# Altium PCB PCB1.PcbDoc
Units mil, origin at the board's own origin, x right, y up, seen from the top; angles counter-clockwise.
Board outline 6000 x 4000 mil, 2 copper layers (Top Layer, Bottom Layer); 15 components, 1 nets, 164 pads, 0 vias.
Unrouted connection lines stored in the file: 15.
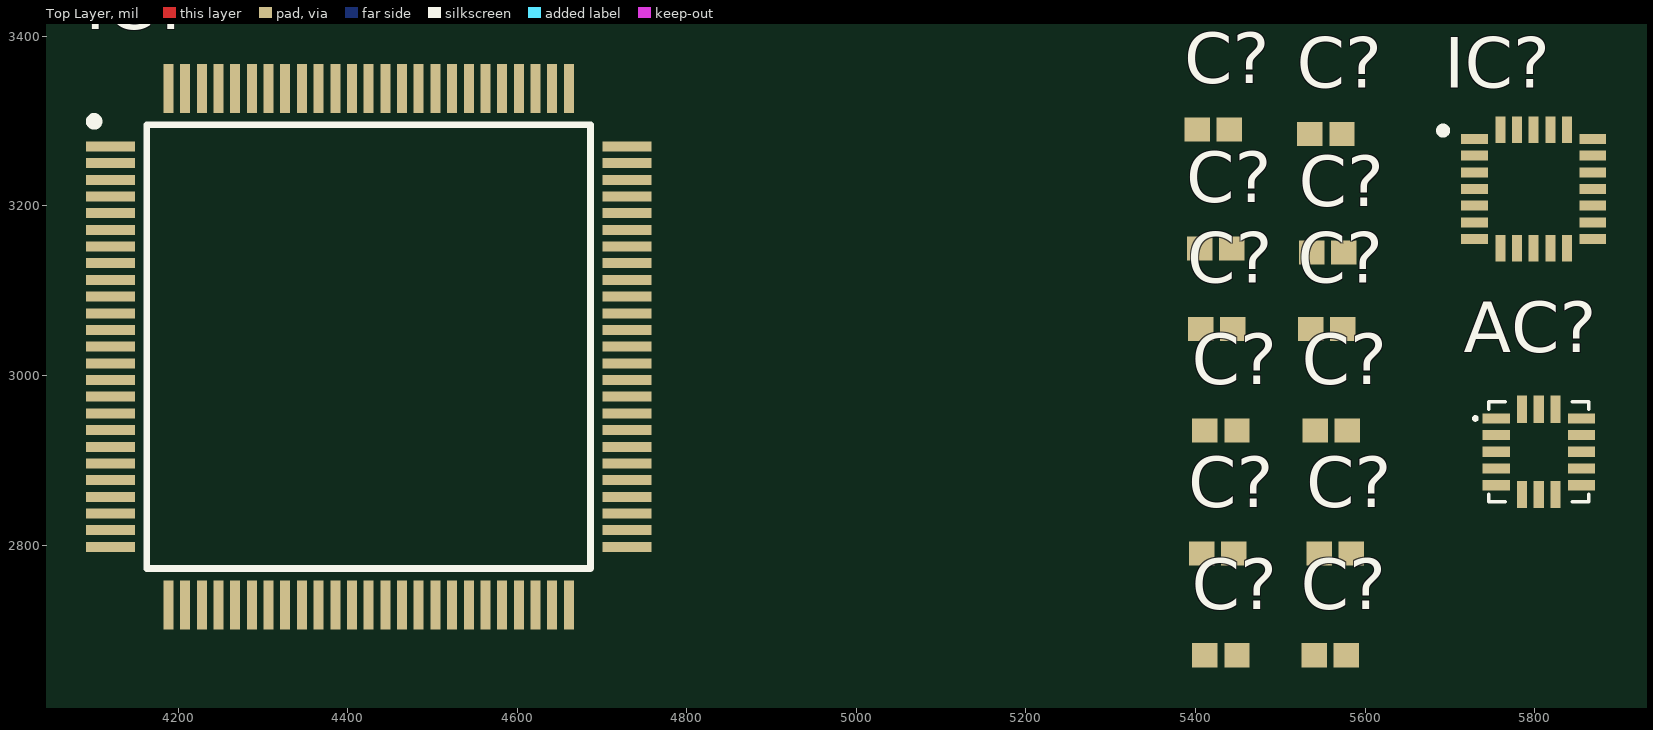
[diagram p0: Top Layer view]
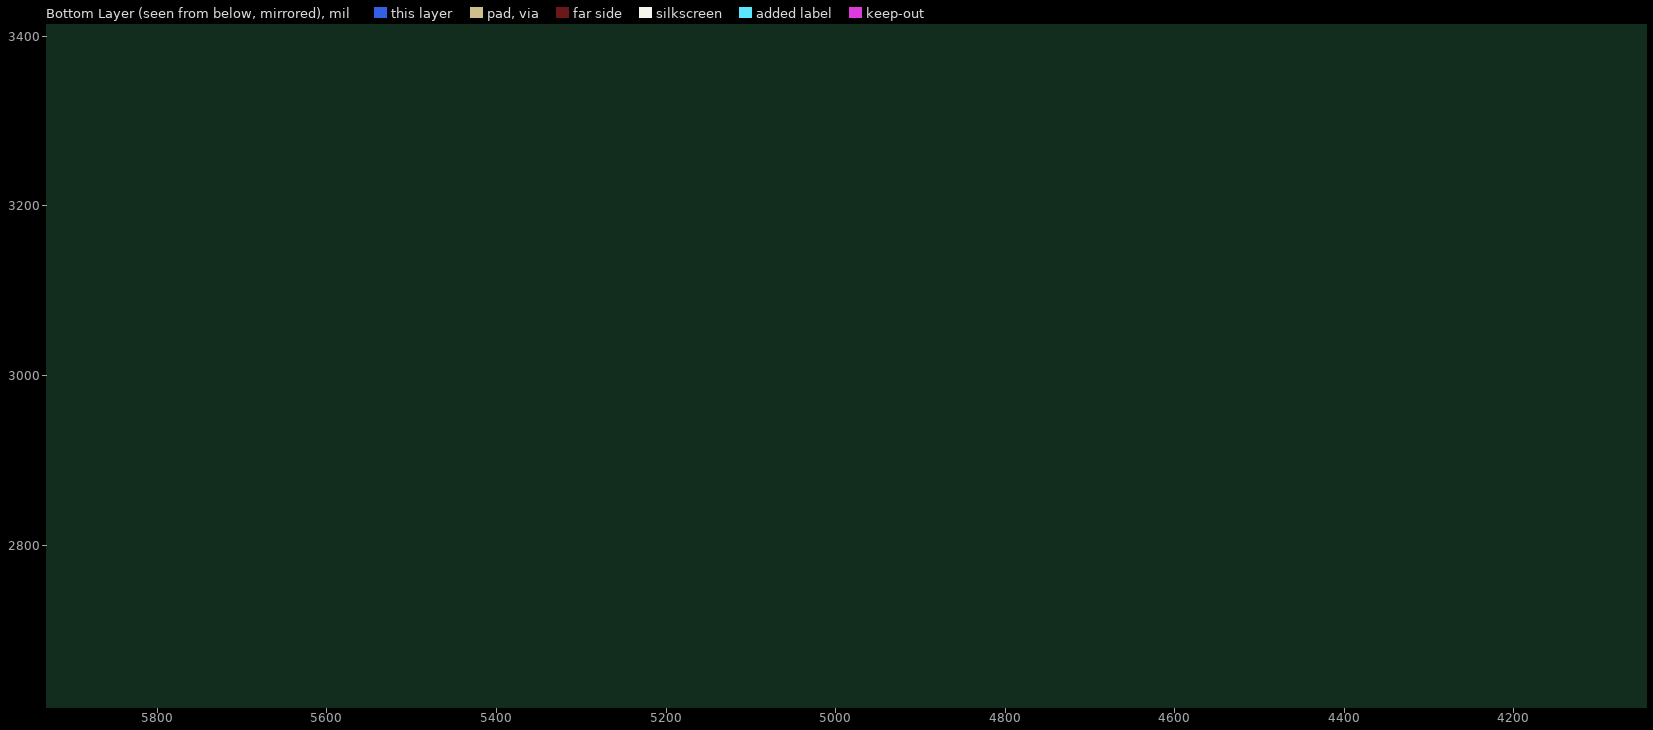
[diagram p1: Bottom Layer view, seen from below]

## Layer stack, top to bottom
Top Solder: solder mask 0.4, Solder Resist, Dk 3.5
Top Layer: signal copper 1.4
Dielectric 1: dielectric 12.6, FR-4, Dk 4.8
Bottom Layer: signal copper 1.4
Bottom Solder: solder mask 0.4, Solder Resist, Dk 3.5

## Board outline
1000,1000 7000,1000 7000,5000 1000,5000

## Design rules (kind name [scope] priority, off if disabled: settings)
Clearance [All] p1: gap=10 ignorepadtopadclearanceinfootprint=FALSE except(0: Arc-Hole Track-Hole SMDPad-Hole THPad-Hole Via-Hole Fill-Hole Poly-Hole Region-Hole Text-Hole)
PolygonConnect [All] p1: connectstyle=Relief reliefconductorwidth=10 reliefentries=4 polygonreliefangle="90 Angle" airgapwidth=10
RoomDefinition Sheet1 [InComponentClass('Sheet1')] p1: confinementstyle=ConfineIn formatcopy=TRUE lockcomponents=FALSE outline 2658.9,2615 5893.9,2615 5893.9,3415 2658.9,3415
RoutingVias [All] p1: holewidth=28 width=50 viastyle="Through Hole" minholewidth=28 minwidth=50 maxholewidth=28 maxwidth=50
SolderMaskExpansion [All] p1: expansion=4 istentingtop=FALSE
Width [All] p1: maxlimit=10 minlimit=10 preferedwidth=10
30 further rules are at their usual default settings.

## Classes and differential pairs
component class Sheet1: AC? C? IC?

## Components (designator, comment, footprint, x,y, rotation, side; value= is the part's Value field where it differs from the comment)
AC? "FXOS8700CQR1" MMA8452QT 5805,2910 r0 top
C? "C0402C104J4RACTU" CAPC1005X55X30ML05T10 5430,2670 r0 top
C? "C0402C104J4RACTU" CAPC1005X55X30ML05T10 5560,2935 r0 top
C? "C0402C104J4RACTU" CAPC1005X55X30ML05T10 5553.9,3285 r0 top
C? "C0402C104J4RACTU" CAPC1005X55X30ML05T10 5556.1,3145 r0 top
C? "C0402C104J4RACTU" CAPC1005X55X30ML05T10 5430,2935 r0 top
C? "C0402C104J4RACTU" CAPC1005X55X30ML05T10 5421.1,3290 r0 top
C? "C0402C104J4RACTU" CAPC1005X55X30ML05T10 5565,2790 r0 top
C? "C0402C104J4RACTU" CAPC1005X55X30ML05T10 5555,3055 r0 top
C? "C0402C104J4RACTU" CAPC1005X55X30ML05T10 5558.9,2670 r0 top
C? "C0402C104J4RACTU" CAPC1005X55X30ML05T10 5426.1,2790 r0 top
C? "C0402C104J4RACTU" CAPC1005X55X30ML05T10 5425,3055 r0 top
C? "C0402C104J4RACTU" CAPC1005X55X30ML05T10 5423.9,3150 r0 top
IC? "STM32L4S5VIT6" QFP50P1600X1600X160-100N 4424.65,3034.06 r0 top
IC? "FXAS21002CQR1" FXAS21002CQR1 5798.9,3220 r0 top

## Footprints (in the part's own frame and the unit in brackets; to place one, negate y for a bottom-side part, rotate by r counter-clockwise, add the part's x,y. Pads: shape width x height; smd on the part's side, far side on the other; paste and mask are expansions set on the pad)
CAPC1005X55X30ML05T10 [mm] "Chip Capacitor, 2-Leads, Body 1.00x0.50mm, IPC Low Density"
  rect 0.76x0.72 smd: 1(-0.48,0) 2(0.48,0)
  body extent -0.53,-0.28 0.53,0.27, height 0.55
FXAS21002CQR1 [mm]
  rect 0.8x0.3 smd: 1(-1.775,1.5) 2(-1.775,1) 3(-1.775,0.5) 4(-1.775,0) 5(-1.775,-0.5) 6(-1.775,-1) 7(-1.775,-1.5) 13(1.775,-1.5) 14(1.775,-1) 15(1.775,-0.5) 16(1.775,0) 17(1.775,0.5) 18(1.775,1) 19(1.775,1.5)
  rect 0.3x0.8 smd: 8(-1,-1.775) 9(-0.5,-1.775) 10(0,-1.775) 11(0.5,-1.775) 12(1,-1.775) 20(1,1.775) 21(0.5,1.775) 22(0,1.775) 23(-0.5,1.775) 24(-1,1.775)
  silkscreen extent -2.82,1.64 -2.6,1.86
MMA8452QT [mm]
  rect 0.813x0.305 smd: 1(-1.275,1) 2(-1.275,0.5) 3(-1.275,0) 4(-1.275,-0.5) 5(-1.275,-1) 9(1.275,-1) 10(1.275,-0.5) 11(1.275,0) 12(1.275,0.5) 13(1.275,1)
  rect 0.305x0.813 smd: 6(-0.5,-1.275) 7(0,-1.275) 8(0.5,-1.275) 14(0.5,1.275) 15(0,1.275) 16(-0.5,1.275)
  silkscreen extent -1.95,-1.5 1.5,1.5, body extent -1.65,-1.65 1.65,1.65, height 1.1
QFP50P1600X1600X160-100N [mm]
  rect 1.475x0.3 smd: 1(-7.738,6) 2(-7.738,5.5) 3(-7.738,5) 4(-7.738,4.5) 5(-7.738,4) 6(-7.738,3.5) 7(-7.738,3) 8(-7.738,2.5) 9(-7.738,2) 10(-7.738,1.5) 11(-7.738,1) 12(-7.738,0.5) 13(-7.738,0) 14(-7.738,-0.5) 15(-7.738,-1) 16(-7.738,-1.5) 17(-7.738,-2) 18(-7.738,-2.5) 19(-7.738,-3) 20(-7.738,-3.5) 21(-7.738,-4) 22(-7.738,-4.5) 23(-7.738,-5) 24(-7.738,-5.5) 25(-7.738,-6) 51(7.738,-6) 52(7.738,-5.5) 53(7.738,-5) 54(7.738,-4.5) 55(7.738,-4) 56(7.738,-3.5) 57(7.738,-3) 58(7.738,-2.5) 59(7.738,-2) 60(7.738,-1.5) 61(7.738,-1) 62(7.738,-0.5) 63(7.738,0) 64(7.738,0.5) 65(7.738,1) 66(7.738,1.5) 67(7.738,2) 68(7.738,2.5) 69(7.738,3) 70(7.738,3.5) 71(7.738,4) 72(7.738,4.5) 73(7.738,5) 74(7.738,5.5) 75(7.738,6)
  rect 0.3x1.475 smd: 26(-6,-7.738) 27(-5.5,-7.738) 28(-5,-7.738) 29(-4.5,-7.738) 30(-4,-7.738) 31(-3.5,-7.738) 32(-3,-7.738) 33(-2.5,-7.738) 34(-2,-7.738) 35(-1.5,-7.738) 36(-1,-7.738) 37(-0.5,-7.738) 38(0,-7.738) 39(0.5,-7.738) 40(1,-7.738) 41(1.5,-7.738) 42(2,-7.738) 43(2.5,-7.738) 44(3,-7.738) 45(3.5,-7.738) 46(4,-7.738) 47(4.5,-7.738) 48(5,-7.738) 49(5.5,-7.738) 50(6,-7.738) 76(6,7.738) 77(5.5,7.738) 78(5,7.738) 79(4.5,7.738) 80(4,7.738) 81(3.5,7.738) 82(3,7.738) 83(2.5,7.738) 84(2,7.738) 85(1.5,7.738) 86(1,7.738) 87(0.5,7.738) 88(0,7.738) 89(-0.5,7.738) 90(-1,7.738) 91(-1.5,7.738) 92(-2,7.738) 93(-2.5,7.738) 94(-3,7.738) 95(-3.5,7.738) 96(-4,7.738) 97(-4.5,7.738) 98(-5,7.738) 99(-5.5,7.738) 100(-6,7.738)
  silkscreen extent -8.35,-6.65 6.65,6.87, body extent -8,-8 8,8, height 1.6

## Part data
AC?: "Accelerometer", Manufacturer_Name=Nexperia, Mouser Part Number=841-FXOS8700CQR1, Datasheet Link=http://cache.nxp.com/files/shared/doc/package_info/98ASA00318D.pdf, Height=1mm, Manufacturer_Part_Number=FXOS8700CQR1, Mouser Price/Stock=https://www.mouser.com/Search/Refine.aspx?Keyword=841-FXOS8700CQR1
C? C? C? C? C? C? C? C? C? C? C? C?: library part CMP-2008-03080-1, Manufacturer=Kemet, Part Number=C0402C104J4RACTU
IC?: "Integrated Circuit", Manufacturer_Name=STMicroelectronics, Mouser Part Number=511-STM32L4S5VIT6, RS Part Number=1750803P, Datasheet Link=https://www.mouser.com/datasheet/2/389/stm32l4s5ai-1309291.pdf, Height=1.6mm, Manufacturer_Part_Number=STM32L4S5VIT6, Mouser Price/Stock=https://www.mouser.com/Search/Refine.aspx?Keyword=511-STM32L4S5VIT6, RS Price/Stock=http://uk.rs-online.com/web/p/products/1750803P
IC?: "Integrated Circuit", Manufacturer_Name=Nexperia, Mouser Part Number=841-FXAS21002CQR1, Datasheet Link=http://www.mouser.com/ds/2/302/FXAS21002-783424.pdf, Manufacturer_Part_Number=FXAS21002CQR1, Mouser Price/Stock=https://www.mouser.com/Search/Refine.aspx?Keyword=841-FXAS21002CQR1

## Nets (pads, with @x,y where several pads share a name; then routed paths per layer and width w, separated by ;. In a path a pad name is that pad's centre, name@x,y a point inside that pad or via, vN(x,y) a via of type N, cw(c..) or ccw(c..) an arc to the next point about the centre after c; other vN are vias at no path point)
GND: AC?.12 AC?.13 IC?.1@5729.02,3279.06 IC?.5@5729.02,3200.32 IC?.6@5729.02,3180.63 IC?.7@5729.02,3160.94 IC?.8@5759.53,3150.12 IC?.9@5779.21,3150.12 IC?.10@5798.9,3150.12 IC?.14@5868.78,3180.63 IC?.19@5868.78,3279.06 IC?.20@5838.27,3289.88 IC?.21@5818.58,3289.88 IC?.22@5798.9,3289.88 IC?.23@5779.21,3289.88 IC?.24@5759.53,3289.88
pads on no net: AC?.1 AC?.2 AC?.3 AC?.4 AC?.5 AC?.6 AC?.7 AC?.8 AC?.9 AC?.10 AC?.11 AC?.14 AC?.15 AC?.16 C?.1 C?.2 IC?.1@4120,3270.28 IC?.2 IC?.3 IC?.4 IC?.5@4120,3191.54 IC?.6@4120,3171.85 IC?.7@4120,3152.17 IC?.8@4120,3132.48 IC?.9@4120,3112.8 IC?.10@4120,3093.11 IC?.11 IC?.12 IC?.13 IC?.14@4120,3014.37 IC?.15 IC?.16 IC?.17 IC?.18 IC?.19@4120,2915.94 IC?.20@4120,2896.26 IC?.21@4120,2876.57 IC?.22@4120,2856.89 IC?.23@4120,2837.2 IC?.24@4120,2817.52 IC?.25 IC?.26 IC?.27 IC?.28 IC?.29 IC?.30 IC?.31 IC?.32 IC?.33 IC?.34 IC?.35 IC?.36 IC?.37 IC?.38 IC?.39 IC?.40 IC?.41 IC?.42 IC?.43 IC?.44 IC?.45 IC?.46 IC?.47 IC?.48 IC?.49 IC?.50 IC?.51 IC?.52 IC?.53 IC?.54 IC?.55 IC?.56 IC?.57 IC?.58 IC?.59 IC?.60 IC?.61 IC?.62 IC?.63 IC?.64 IC?.65 IC?.66 IC?.67 IC?.68 IC?.69 IC?.70 IC?.71 IC?.72 IC?.73 IC?.74 IC?.75 IC?.76 IC?.77 IC?.78 IC?.79 IC?.80 IC?.81 IC?.82 IC?.83 IC?.84 IC?.85 IC?.86 IC?.87 IC?.88 IC?.89 IC?.90 IC?.91 IC?.92 IC?.93 IC?.94 IC?.95 IC?.96 IC?.97 IC?.98 IC?.99 IC?.100